# Altium PCB MiniRobot.PcbDoc
Units mm, origin at the board's own origin, x right, y up, seen from the top; angles counter-clockwise.
Board outline 90 x 85 mm, 2 copper layers (Top Layer, Bottom Layer); 52 components, 47 nets, 193 pads, 19 vias.
Unrouted connection lines stored in the file: 43.
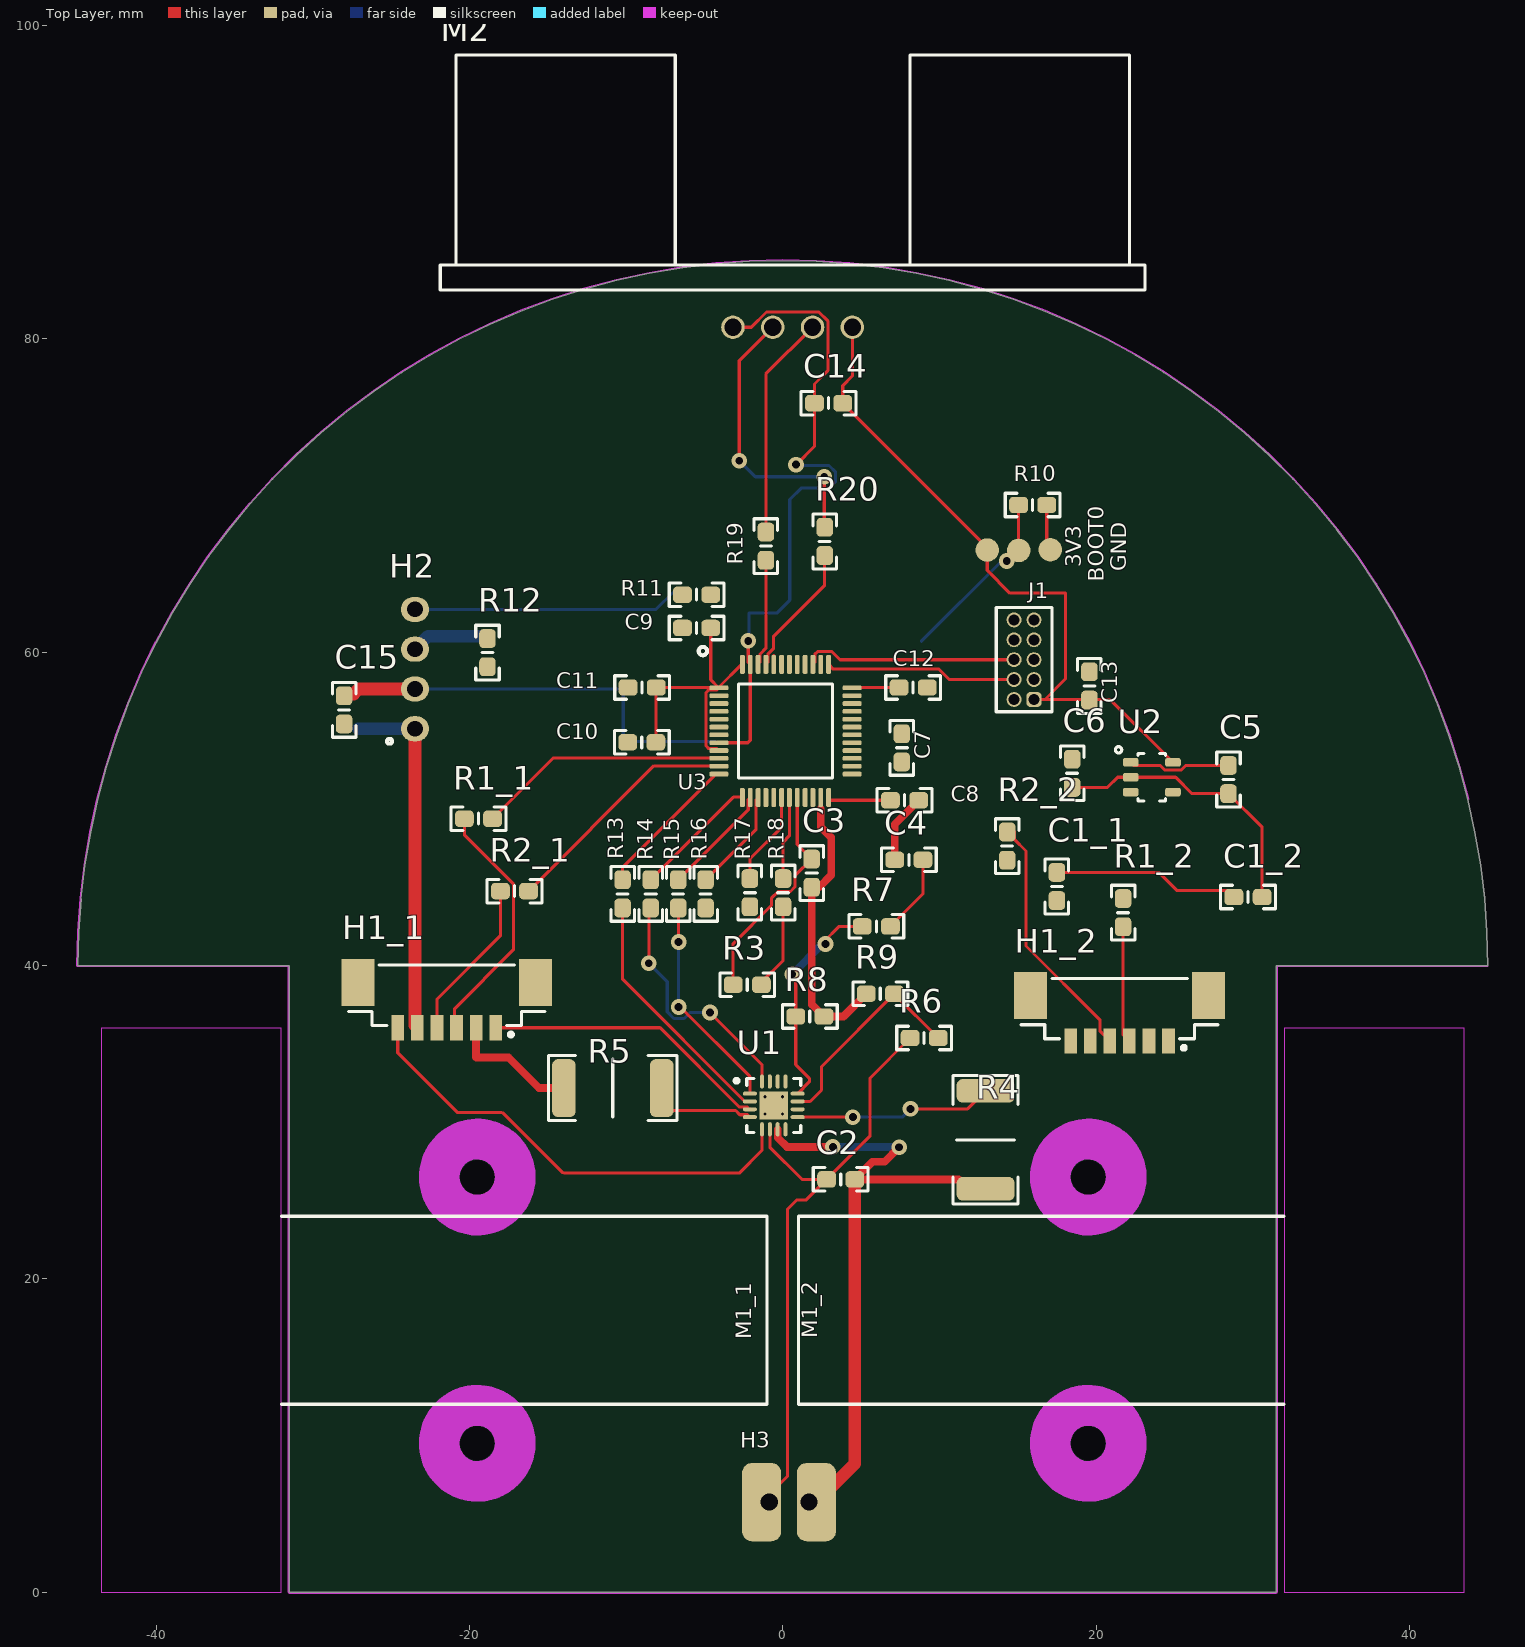
[diagram p0: Top Layer view]
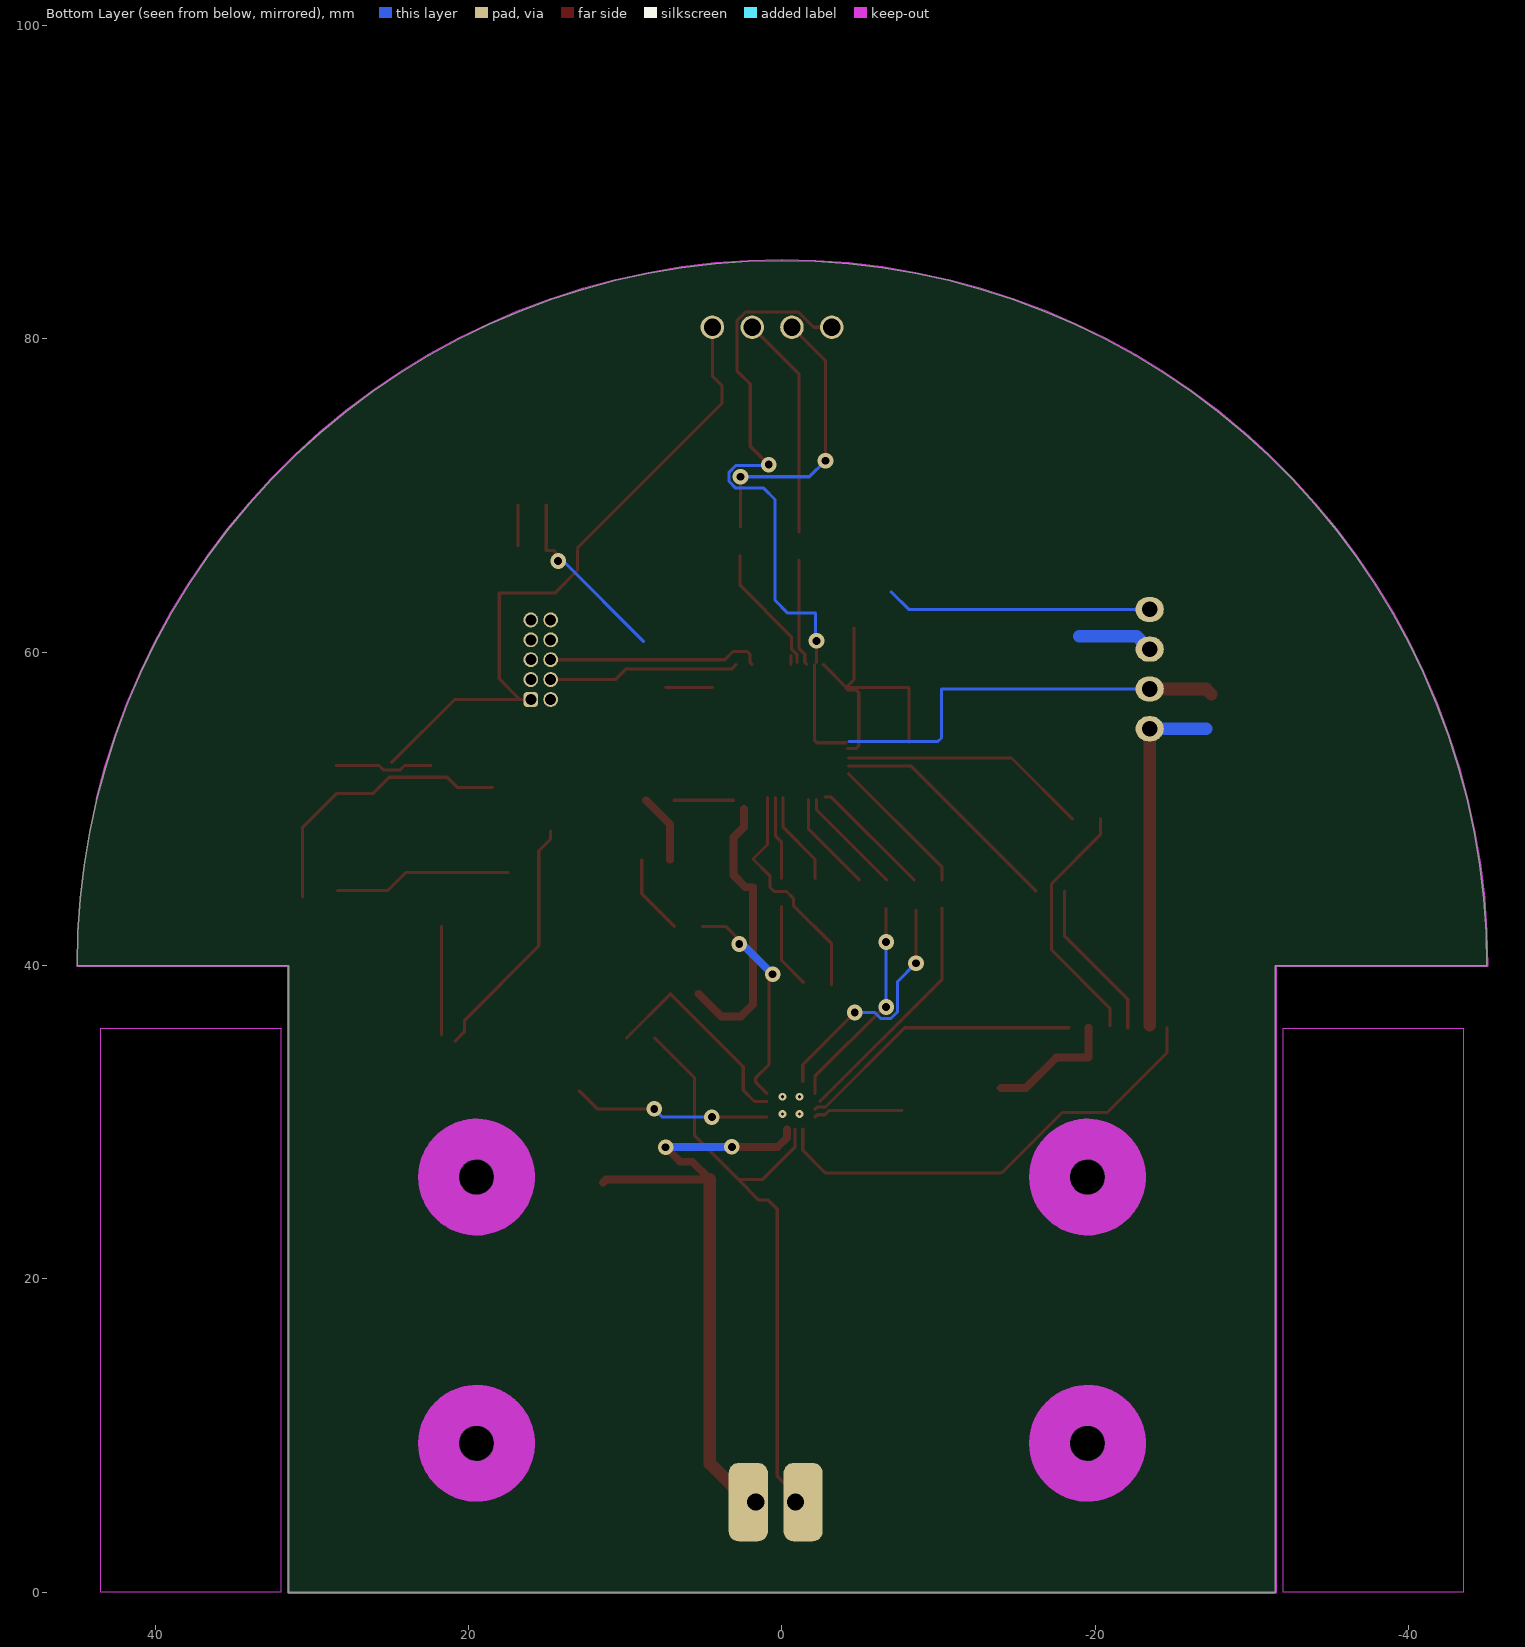
[diagram p1: Bottom Layer view, seen from below]

## Layer stack, top to bottom
Top Solder: solder mask 0.0102, Solder Resist, Dk 3.5
Top Layer: signal copper 0.0356
Dielectric 1: dielectric 0.32, FR-4, Dk 4.8
Bottom Layer: signal copper 0.0356
Bottom Solder: solder mask 0.0102, Solder Resist, Dk 3.5

## Board outline
45,40 44.949,42.141 44.796,44.278 44.542,46.404 44.187,48.516 43.732,50.609 43.177,52.678 42.525,54.718 41.777,56.725 40.933,58.694 39.998,60.62 38.971,62.5 37.856,64.329 36.656,66.103 35.372,67.817 34.009,69.469 32.568,71.054 31.054,72.568 29.469,74.009 27.817,75.372 26.103,76.656 24.329,77.856 22.5,78.971 20.62,79.998 18.694,80.933 16.725,81.777 14.718,82.525 12.678,83.177 10.609,83.732 8.516,84.187 6.404,84.542 4.278,84.796 2.141,84.949 0,85 -2.141,84.949 -4.278,84.796 -6.404,84.542 -8.516,84.187 -10.609,83.732 -12.678,83.177 -14.718,82.525 -16.725,81.777 -18.694,80.933 -20.62,79.998 -22.5,78.971 -24.329,77.856 -26.103,76.656 -27.817,75.372 -29.469,74.009 -31.054,72.568 -32.568,71.054 -34.009,69.469 -35.372,67.817 -36.656,66.103 -37.856,64.329 -38.971,62.5 -39.998,60.62 -40.933,58.694 -41.777,56.725 -42.525,54.718 -43.177,52.678 -43.732,50.609 -44.187,48.516 -44.542,46.404 -44.796,44.278 -44.949,42.141 -45,40 -31.5,40 -31.5,0 31.5,0 31.5,40

## Design rules (kind name [scope] priority, off if disabled: settings)
Clearance [All] p1: gap=0.125
ComponentClearance [All] p1 off: gap=0.254 collisioncheckmode=3 verticalgap=0.254 showdistances=FALSE
HoleSize [All] p1: absolutevalues=TRUE maxlimit=10 minlimit=0.19 maxpercent=80.000 minpercent=20.000
MinimumAnnularRing [All] p1: minimumring=0.076
MinimumSolderMaskSliver [All] p1: minsoldermaskwidth=0.154
PolygonConnect [All] p1: connectstyle=Relief reliefconductorwidth=0.254 reliefentries=4 polygonreliefangle="45 Angle" airgapwidth=0.254
RoutingVias [All] p1: holewidth=0.25 width=0.6 viastyle="Through Hole" minholewidth=0.2 minwidth=0.45 maxholewidth=1 maxwidth=2
SilkToSilkClearance [All] p1: silktosilkclearance=0.154
SilkToSolderMaskClearance [IsPad] p1: minsilkscreentomaskgap=0 clearancetoexposedcopper=TRUE
SolderMaskExpansion SolderMask_Via [IsVia] p1: expansion=-100
SolderMaskExpansion [All] p2: expansion=0.102
Width [All] p1: maxlimit=10 minlimit=0.075 preferedwidth=0.2 minimp=50.000000 maximp=50.000000 favimp=50.000000
24 further rules are at their usual default settings.

## Classes and differential pairs
component class U_MR_Mcu: 3V3 BOOT0 C7 C8 C9 C10 C11 C12 C13 GND J1 R10 R11 R13 R14 R15 R16 R17 R18 U3
component class LeftMotor: C1_1 H1_1 M1_1 R1_1 R2_1
component class RightMotor: C1_2 H1_2 M1_2 R1_2 R2_2
component class U_MR_Power: C5 C6 H3 U2
channel class MR_Motor: LeftMotor RightMotor
component class U_MR_Motor_Control: C2 C3 C4 R3 R4 R5 R6 R7 R8 R9 U1
component class U_MR_RangeSensor: C14 M2 R20
component class U_MR_UartConnector: C15 H2 R12

## Components (designator, comment, footprint, x,y, rotation, side; value= is the part's Value field where it differs from the comment)
3V3 "TestPoint" ROUND_TEST_POINT 13.05,66.525 r180 top
BOOT0 "TestPoint" ROUND_TEST_POINT 15.063,66.5 r270 top
C1_1 "CerCap" 0603_CAP_LD 17.5,45.05 r90 top (schematic designator C1)
C1_2 "CerCap" 0603_CAP_LD 29.7,44.375 r180 top (schematic designator C1)
C2 "CerCap" 0603_CAP_LD 3.7,26.35 r180 top
C3 "CerCap" 0603_CAP_LD 1.85,45.9 r90 top
C4 "CerCap" 0603_CAP_LD 8.05,46.75 r0 top
C5 "CerCap" 0603_CAP_LD 28.45,51.875 r90 top
C6 "CerCap" 0603_CAP_LD 18.475,52.275 r90 top
C7 "CerCap" 0603_CAP_LD 7.6,53.9 r270 top
C8 "CerCap" 0603_CAP_LD 7.775,50.55 r180 top
C9 "CerCap" 0603_CAP_LD -5.5,61.55 r0 top
C10 "CerCap" 0603_CAP_LD -9,54.25 r0 top
C11 "CerCap" 0603_CAP_LD -8.975,57.75 r0 top
C12 "CerCap" 0603_CAP_LD 8.325,57.75 r180 top
C13 "CerCap" 0603_CAP_LD 19.575,57.85 r270 top
C14 "CerCap" 0603_CAP_LD 2.925,75.9 r0 top
C15 "CerCap" 0603_CAP_LD -28,56.325 r270 top
GND "TestPoint" ROUND_TEST_POINT 17.075,66.55 r90 top
H1_1 "Header" HEADER_1X6_PICOBLADE_653106124022 -21.45,38.1 r180 top (schematic designator H1)
H1_2 "Header" HEADER_1X6_PICOBLADE_653106124022 21.5,37.25 r180 top (schematic designator H1)
H2 "Header" "HE14 1x4 Straight" -23.475,58.925 r90 top
H3 "CustomBatteryConnector" CUSTOMBATTERYCONNECTOR 0.4,5.75 r0 top
J1 "Debug" 62201021121 15.4,59.525 r90 top
M1_1 "MotorGroup" MOTORGROUP -1,18 r0 top locked (schematic designator M1)
M1_2 "MotorGroup" MOTORGROUP 1,18 r180 top locked (schematic designator M1)
M2 "Ultrasonic Range Sensor" HC-SR04 0.633,80.748 r0 top
R1_1 "Resistor" 0603_RES_LD -19.425,49.375 r180 top (schematic designator R1)
R1_2 "Resistor" 0603_RES_LD 21.725,43.375 r270 top (schematic designator R1)
R2_1 "Resistor" 0603_RES_LD -17.125,44.75 r180 top (schematic designator R2)
R2_2 "Resistor" 0603_RES_LD 14.325,47.625 r90 top (schematic designator R2)
R3 "Resistor" 0603_RES_LD -2.267,38.774 r0 top
R4 "Resistor" 2512_RES_LD 12.95,28.875 r90 top
R5 "Resistor" 2512_RES_LD -10.85,32.175 r0 top
R6 "Resistor" 0603_RES_LD 9.025,35.375 r180 top
R7 "Resistor" 0603_RES_LD 5.975,42.5 r180 top
R8 "Resistor" 0603_RES_LD 1.725,36.75 r180 top
R9 "Resistor" 0603_RES_LD 6.225,38.2 r0 top
R10 "Resistor" 0603_RES_LD 15.95,69.4 r180 top
R11 "Resistor" 0603_RES_LD -5.5,63.675 r0 top
R12 "Resistor" 0603_RES_LD -18.85,59.975 r90 top
R13 "Resistor" 0603_RES_LD -10.225,44.575 r90 top
R14 "Resistor" 0603_RES_LD -8.425,44.575 r90 top
R15 "Resistor" 0603_RES_LD -6.675,44.575 r90 top
R16 "Resistor" 0603_RES_LD -4.925,44.575 r90 top
R17 "Resistor" 0603_RES_LD -2.1,44.65 r90 top
R18 "Resistor" 0603_RES_LD 0.025,44.65 r90 top
R19 "Resistor" 0603_RES_LD -1.075,66.775 r270 top
R20 "Resistor" 0603_RES_LD 2.675,67.075 r90 top
U1 "Dual Brush Motor Driver" QFN-STSPIN240 -0.575,31.075 r0 top
U2 "Low noise, Low Iq LDO" LP5907 23.558,52.023 r0 top
U3 "Microcontroller" STM32_LQFP48 0.175,54.975 r0 top

## Footprints (in the part's own frame and the unit in brackets; to place one, negate y for a bottom-side part, rotate by r counter-clockwise, add the part's x,y. Pads: shape width x height; smd on the part's side, far side on the other; paste and mask are expansions set on the pad)
0603_CAP_LD [mm] "0603 Capacitor Low Density"
  rrect50% 1.2x1.05 smd: 1(-0.9,0) 2(0.9,0)
  silkscreen extent -1.75,-0.75 1.75,0.75
0603_RES_LD [mm] "0603 Resistor Low Density"
  rrect50% 1.2x1.05 smd: 1(-0.9,0) 2(0.9,0)
  silkscreen extent -1.75,-0.75 1.75,0.75
2512_RES_LD [mm] "2512 Low Density Resistor"
  rrect50% 1.5x3.7 smd: 1(-3.125,0) 2(3.125,0)
  silkscreen extent -4.1,-2.07 4.1,2.07
62201021121 [mm] "Pin Header, pitch 1.27 mm, THT, Vertical, dual row, 10p"
  rrect50% 0.95x0.95 hole 0.7: 1(-2.54,-0.635)
  round 0.95 hole 0.7: 2(-2.54,0.635) 3(-1.27,-0.635) 4(-1.27,0.635) 5(0,-0.635) 6(0,0.635) 7(1.27,-0.635) 8(1.27,0.635) 9(2.54,-0.635) 10(2.54,0.635)
  silkscreen extent -3.32,-1.78 3.32,1.78, body extent -3.17,-1.7 3.18,1.7, height 5.33
CUSTOMBATTERYCONNECTOR [mm] "CustomBatteryConnector"
  rrect50% 2.5x5 smd paste-100: +(-1.75,0) -(1.75,0)
  rrect50% 2.5x5 smd far side paste-100: +(-1.75,0) -(1.75,0)
  round 1.5 hole 1.1 unplated paste-100: +(-1.27,0) -(1.27,0)
HC-SR04 [mm] "HC-SR04"
  round 1.5 hole 1.1 unplated: 1(-3.81,0) 2(-1.27,0) 3(1.27,0) 4(3.81,0)
  silkscreen extent -22.5,2.38 22.5,17.38, body extent -22.72,-0.3 22.72,17.49, height 20
"HE14 1x4 Straight" [mm] "Connector HE14 Straight 1x4"
  oval 1.6x1.8 hole 1 mask+0.102: 1(-3.81,0) 2(-1.27,0) 3(1.27,0) 4(3.81,0)
  silkscreen extent -4.77,1.47 -4.45,1.78, body extent -5.08,-1.27 5.08,1.27, height 9.5
HEADER_1X6_PICOBLADE_653106124022 [mm] "1.25mm SMT Male Vertical Shrouded Header, 6p"
  rect 0.81x1.6 smd: 1(-3.125,2.07) 2(-1.875,2.07) 3(-0.625,2.07) 4(0.625,2.07) 5(1.875,2.07) 6(3.125,2.07)
  rect 2.1x3 smd: ""(-5.675,-0.83) ""(5.675,-0.83)
  silkscreen extent -6.27,-1.92 6.27,2.62
LP5907 [mm] "LP5907 SOT23"
  rrect50% 1x0.55 smd mask+0.102: 1(-1.35,0.95) 2(-1.35,0) 3(-1.35,-0.95) 4(1.35,-0.95) 5(1.35,0.95)
  silkscreen extent -2.33,-1.52 0.88,1.95
MOTORGROUP [mm]
  round 0 hole 2.2 unplated paste+0 mask+0: 21(-18.5,8.5) 22(-18.5,-8.5)
  Keep-Out Layer circle w2.6: c-18.5,8.5 r2.425
  Keep-Out Layer circle w2.6: c-18.5,-8.5 r2.425
  Keep-Out Layer region: -31,-18 -31,18 -42.5,18 -42.5,-18
  silkscreen extent -31,-6 0,6
QFN-STSPIN240 [mm] "QFN, 16-Leads, Body 3,00x3,00mm, Pitch 0,50mm, Thermal Pad 1,80x1,80mm, IPC Low Density"
  oval 0.9x0.25 smd: 1(-1.525,0.75) 2(-1.525,0.25) 3(-1.525,-0.25) 4(-1.525,-0.75) 9(1.525,-0.75) 10(1.525,-0.25) 11(1.525,0.25) 12(1.525,0.75)
  oval 0.25x0.9 smd: 5(-0.75,-1.525) 6(-0.25,-1.525) 7(0.25,-1.525) 8(0.75,-1.525) 13(0.75,1.525) 14(0.25,1.525) 15(-0.25,1.525) 16(-0.75,1.525)
  rect 1.8x1.8 smd: 17(0,0)
  silkscreen extent -2.5,-1.73 1.73,1.73
ROUND_TEST_POINT [mm] "Small round test point"
  round 1.5 smd paste-100: 1(0,0)
STM32_LQFP48 [mm]
  rrect50% 1.2x0.3 smd: 1(-4.25,2.75) 2(-4.25,2.25) 3(-4.25,1.75) 4(-4.25,1.25) 5(-4.25,0.75) 6(-4.25,0.25) 7(-4.25,-0.25) 8(-4.25,-0.75) 9(-4.25,-1.25) 10(-4.25,-1.75) 11(-4.25,-2.25) 12(-4.25,-2.75) 25(4.25,-2.75) 26(4.25,-2.25) 27(4.25,-1.75) 28(4.25,-1.25) 29(4.25,-0.75) 30(4.25,-0.25) 31(4.25,0.25) 32(4.25,0.75) 33(4.25,1.25) 34(4.25,1.75) 35(4.25,2.25) 36(4.25,2.75)
  rrect50% 0.3x1.2 smd: 13(-2.75,-4.25) 14(-2.25,-4.25) 15(-1.75,-4.25) 16(-1.25,-4.25) 17(-0.75,-4.25) 18(-0.25,-4.25) 19(0.25,-4.25) 20(0.75,-4.25) 21(1.25,-4.25) 22(1.75,-4.25) 23(2.25,-4.25) 24(2.75,-4.25) 37(2.75,4.25) 38(2.25,4.25) 39(1.75,4.25) 40(1.25,4.25) 41(0.75,4.25) 42(0.25,4.25) 43(-0.25,4.25) 44(-0.75,4.25) 45(-1.25,4.25) 46(-1.75,4.25) 47(-2.25,4.25) 48(-2.75,4.25)
  silkscreen extent -5.54,-3 3,5.37

## Part data
C1_1 C1_2 C2 C3 C4 C5 C6 C7 C8 C9 C10 C11 C12 C13 C14 C15: "Ceramic Capacitor"
H1_1 H1_2: library part Header_6x1, "Header 6x1 Pins"
H2: library part Header_4x1, "Header 4x1 PIns"
H3: library part BatteryConnector, "Custom Battery Connector"
J1: library part Cortex_10x2, "Cortex 10 pins Debug Connector"
M1_1 M1_2: library part Motor
M2: library part HC-SR04
U1: library part STSPIN240, "ST Dual Motor Driver"
U2: library part LP5907, "LP5907 Low Noise Low Iq LDO"
U3: library part STM32F303CBT6, "STM32F303 Microcontroller"

## Via types
v1: diameter 1, hole 0.5, Top Layer to Bottom Layer, 15 vias
v2: diameter 0.5, hole 0.2, Top Layer to Bottom Layer, 4 vias

## Nets (pads, with @x,y where several pads share a name; then routed paths per layer and width w, separated by ;. In a path a pad name is that pad's centre, name@x,y a point inside that pad or via, vN(x,y) a via of type N, cw(c..) or ccw(c..) an arc to the next point about the centre after c; other vN are vias at no path point)
3V3: 3V3.1 C6.2 C7.2 C8.2 C9.2 C10.2 C11.2 C12.2 C13.2 C14.2 J1.1 M2.4 U2.5 U3.1 U3.9 U3.24 U3.36 U3.48 | length 68.4
  Top Layer w0.2: C10.2 -8.1,57.725 C11.2 U3.1@-4.1,57.75 ; C9.2 -4.6,58.25 U3.1@-4.1,57.75 ; U3.9@-4.2,53.85 -4.724,53.85 -4.9,54.026 -4.9,57.424 -4.724,57.6 -4.2,57.6 U3.1 U3.1@-4.1,57.75 ; U3.48@-2.625,59.225 U3.1@-4.1,57.75 ; 3.1,50.55 C8.2 ; M2.4 4.443,77.632 3.825,77.014 C14.2 3V3.1@13.05,66.675 ; U3.36@4.45,57.75 C12.2 ; 3V3.1 13.05,65.225 14.5,63.775 18.05,63.775 18.05,58.3 16.735,56.985 ; J1.1@16.045,56.975 20.906,56.975 U2.5
BOOT0: BOOT0.1 R10.2 U3.44 | length 12.3
  Top Layer w0.2: U3.44 U3.44@-0.575,59.79 ; v1(14.292,65.823) 14.292,66.192 14.6,66.5 BOOT0.1 ; BOOT0.1@15.05,66.513 R10.2
  Bottom Layer w0.2: 8.85,60.7 13.973,65.823 v1(14.292,65.823)
GND: C1_1.1 C1_2.1 C2.1 C3.1 C4.1 C5.1 C6.1 C7.1 C8.1 C9.1 C10.1 C11.1 C12.1 C13.1 C14.1 C15.1 GND.1 H1_1.2 H1_2.2 H2.2 H3.- J1.3 J1.5 J1.9 M2.1 R4.1 R5.1 R8.1 R9.1 R10.1 U1.7 U2.2 U3.8 U3.23 U3.35 U3.47 | length 161.6
  Top Layer w0.2: U3.8 -2.225,54.225 -2.075,54.375 U3.47 ; M2.1 -2.016,80.748 -1.041,81.723 2.307,81.723 2.878,81.152 2.878,77.978 2.025,77.125 C14.1 2.025,73.15 v1(0.85,71.975) ; U3.47@-2.2,59.35 v1(-2.2,60.725) ; GND.1@16.85,66.775 R10.1 ; C6.1 20.725,51.375 21.373,52.023 U2.2 25.077,52.023 26.125,50.975 C5.1 30.6,48.825 C1_2.1
  Top Layer w0.5: H1_1.2 -19.575,34.15 -19.55,34.125 -17.5,34.125 -15.55,32.175 R5.1 ; U1.7 -0.325,29.018 0.268,28.425 v1(3.2,28.425) ; 2.425,49.989 2.425,48.85 3.1,48.175 3.1,45.775 2.325,45 C3.1 1.85,37.525 R8.1 3.875,36.75 R9.1 ; C4.1 7.15,49.025 C8.1 ; v1(7.425,28.4) 6.5,27.475 5.725,27.475 C2.1 11.225,26.35 R4.1@11.425,26.15
  Top Layer w0.8: -27.4,57.325 -27.07,57.655 H2.2 ; H3.-@2.15,5.75 4.6,8.2 C2.1
  Bottom Layer w0.2: H2.2 -10.18,57.655 -10.18,54.53 -9.95,54.3 -4.275,54.3 ; v1(-2.2,60.725) -2.15,60.775 -2.15,62.5 -0.375,62.5 0.45,63.325 0.45,69.75 1.175,70.475 2.95,70.475 3.375,70.9 3.375,71.5 2.95,71.925 0.9,71.925 v1(0.85,71.975)
  Bottom Layer w0.5: v1(3.2,28.425) 7.45,28.425 v1(7.425,28.4)
NetC3_2: C3.2 R3.1 U1.13 U3.20 | length 14.9
  Top Layer w0.2: R3.1 -3.167,41.394 -0.725,43.836 -0.725,44.289 -0.289,44.725 0.489,44.725 0.775,45.011 0.775,45.725 C3.2 0.925,47.725 U3.20
NetC4_2: C4.2 R7.1 | length 5.1
  Top Layer w0.2: R7.1 8.95,44.575 C4.2
NetH1_1_1: H1_1.1 U1.3 | length 18.4
  Top Layer w0.2: H1_1.1 -7.83,36.03 -2.775,30.975 -2.25,30.975 U1.3
NetH1_1_3: H1_1.3 R1_1.2 | length 16.1
  Top Layer w0.2: H1_1.3@-20.95,36.155 -20.95,37.25 -17.2,41 -17.2,45.214 -20.325,48.339 R1_1.2
NetH1_1_4: H1_1.4 R2_1.2 | length 10.4
  Top Layer w0.2: H1_1.4 -22.075,37.85 -18.025,41.9 R2_1.2
NetH1_1_6: H1_1.6 U1.5 | length 29.7
  Top Layer w0.2: H1_1.6 -24.575,34.425 -20.775,30.625 -17.95,30.625 ; -17.875,30.6 -14.08,26.805 ; -13.95,26.75 -2.775,26.75 -1.325,28.2 U1.5
NetH1_2_1: H1_2.1 U1.10
NetH1_2_3: H1_2.3 R1_2.2 | length 6.9
  Top Layer w0.2: H1_2.3@21.725,35.58 R1_2.2
NetH1_2_4: H1_2.4 R2_2.2 | length 15.9
  Top Layer w0.2: R2_2.2@14.775,48.575 14.775,48.064 15.525,47.314 15.525,41.248 20.255,36.518 20.255,35.8 H1_2.4
NetH1_2_6: H1_2.6 U1.8
NetH2_3: H2.3 R12.2 | length 4.8
  Bottom Layer w0.8: H2.3 -22.645,61.025 -18.975,61.025
NetH2_4: H2.4 R11.1 | length 17
  Bottom Layer w0.2: H2.4 -8.09,62.735 -6.975,63.85
NetM2_2: M2.2 R20.2 | length 18.5
  Top Layer w0.2: v1(-2.775,72.225) -2.775,78.61 M2.2 ; R20.2@2.65,68 v1(2.65,71.2)
  Bottom Layer w0.2: v1(-2.775,72.225) -1.75,71.2 v1(2.65,71.2)
NetM2_3: M2.3 R19.1 | length 14.3
  Top Layer w0.2: R19.1 -1.075,77.77 M2.3
NetR1_1_1: R1_1.1 U3.10 | length 15.9
  Top Layer w0.2: R1_1.1 -14.65,53.25 U3.10@-4.25,53.25
NetR1_2_1: R1_2.1 U3.16
NetR2_1_1: R2_1.1 U3.11 | length 15.3
  Top Layer w0.2: R2_1.1 -8.225,52.75 U3.11@-4.25,52.75
NetR2_2_1: R2_2.1 U3.17
NetR3_2: R3.2 R18.1 | length 5.4
  Top Layer w0.2: R3.2@-1.367,38.933 0.025,40.325 R18.1
NetR4_2: R4.2 U1.9 | length 12.7
  Top Layer w0.2: U1.9 v1(4.475,30.325) ; v1(8.15,30.85) 11.8,30.85 R4.2
  Bottom Layer w0.2: v1(4.475,30.325) 7.625,30.325 v1(8.15,30.85)
NetR5_2: R5.2 U1.4 | length 5.7
  Top Layer w0.2: R5.2@-7.65,30.75 -3.01,30.75 -2.735,30.475 -2.25,30.475 U1.4
NetR6_1: R6.1 R9.2 U1.11 | length 13.9
  Top Layer w0.2: U1.11 1.75,31.325 2.475,32.05 2.475,33.55 R9.2 ; R9.2@7.125,38.175 R6.1
NetR7_2: R7.2 R8.2 U1.12 | length 14.4
  Top Layer w0.2: v1(0.6,39.45) 0.825,39.225 R8.2 0.825,33.675 1.7,32.8 1.7,32.575 U1.12 ; v1@2.6,41.5 3.6,42.5 R7.2
  Top Layer w0.5: v1@2.6,41.5 2.723,41.377 v1(2.725,41.377)
  Bottom Layer w0.5: v1(0.6,39.45) 2.527,41.377 v1(2.725,41.377)
NetR11_2: R11.2 U3.42
NetR12_1: R12.1 U3.43
NetR13_1: R13.1 U1.2 | length 15.6
  Top Layer w0.2: R13.1 -10.225,39.13 U1.2@-2.42,31.325
NetR13_2: R13.2 U3.12 | length 9.2
  Top Layer w0.2: R13.2 -10.225,46.275 U3.12@-4.25,52.25
NetR14_1: R14.1 U1.16 | length 15.8
  Top Layer w0.2: v1(-8.55,40.15) R14.1@-8.55,43.55 ; v1(-4.65,37) -1.325,33.675 U1.16
  Bottom Layer w0.2: v1(-8.55,40.15) -7.375,38.975 -7.375,37.05 -6.95,36.625 -6.3,36.625 -5.925,37 v1(-4.65,37)
NetR14_2: R14.2 U3.13 | length 7.9
  Top Layer w0.2: R14.2 -3.15,50.75 -2.75,50.75
NetR15_1: R15.1 U1.1 | length 13.8
  Top Layer w0.2: v1(-6.65,37.35) -6.525,37.35 -2.1,32.925 U1.1 ; v1(-6.65,41.5) R15.1@-6.65,43.65
  Bottom Layer w0.2: v1(-6.65,37.35) v1(-6.65,41.5)
NetR15_2: R15.2 U3.14 | length 7
  Top Layer w0.2: R15.2 -2.2,49.95 U3.14@-2.2,50.6
NetR16_1: R16.1 U1.15
NetR16_2: R16.2 U3.15 | length 6.5
  Top Layer w0.2: R16.2 -1.7,48.7 U3.15@-1.7,50.6
NetR17_1: R17.1 U1.14
NetR17_2: R17.2 U3.18 | length 6
  Top Layer w0.2: R17.2 -2.1,46.8 -0.075,48.825 U3.18
NetR18_2: R18.2 U3.19 | length 5.3
  Top Layer w0.2: R18.2 0.025,47.875 0.425,48.275 U3.19
NetR19_2: R19.2 U3.46 | length 6.9
  Top Layer w0.2: U3.46 -1.45,59.35 -1.45,59.874 -1.075,60.249 R19.2
NetR20_1: R20.1 U3.45 | length 8.3
  Top Layer w0.2: U3.45@-0.95,59.35 -0.95,59.874 -0.6,60.224 -0.6,61 2.675,64.275 R20.1
nRST: J1.10 U3.7
SWCLK: J1.4 U3.37 | length 12.2
  Top Layer w0.2: U3.37 3.225,58.925 9.975,58.925 10.645,58.255 J1.4
SWDIO: J1.2 U3.34 | length 0.2
  Top Layer w0.2: J1.2@14.63,56.85 J1.2
SWO: J1.6 U3.39 | length 13.7
  Top Layer w0.2: U3.39 2.05,59.35 2.05,59.874 2.226,60.05 3.124,60.05 3.649,59.525 J1.6
VBAT: C1_1.2 C1_2.2 | length 11.4
  Top Layer w0.2: C1_1.2 24,45.95 25.15,44.8 C1_2.2@28.375,44.8
VBATT: C2.2 C5.2 C15.2 H1_1.5 H1_2.5 H2.1 H3.+ R6.2 U1.6 U2.1 U2.3 | length 68.4
  Top Layer w0.2: H3.+@-1.35,5.75 0.3,7.4 0.3,24.45 0.875,25.025 1.475,25.025 C2.2 ; U1.6 -0.825,28.4 1.225,26.35 C2.2 ; R6.2 5.575,32.825 5.575,29.125 C2.2 ; U2.1@22.406,52.775 24.094,52.775 24.395,52.473 25.421,52.473 25.723,52.775 C5.2
  Top Layer w0.8: H1_1.5@-23.475,36.18 H2.1
  Bottom Layer w0.8: -27.09,55.115 H2.1
pads on no net: H1_1. H1_2. J1.7 J1.8 M1_1.21 M1_1.22 M1_2.21 M1_2.22 U1.17 U2.4 U3.2 U3.3 U3.4 U3.5 U3.6 U3.21 U3.22 U3.25 U3.26 U3.27 U3.28 U3.29 U3.30 U3.31 U3.32 U3.33 U3.38 U3.40 U3.41
copper on no net:
  other v2: -1.125,30.525 -0.025,30.525 -1.125,31.625 -0.025,31.625

## Keep-outs
Keep-Out Layer:
  lines w0.1: 43.78,50.622 43.226,52.691 ; 45,39.95 31.55,39.95 31.55,0 ; -45.05,40.002 ccw(c-45,40) -45,39.95 ; -45.05,40.001 ccw(c-45,40) -45,39.95 ; -45.05,40.001 -45.05,40.002 ; -45.05,40.002 -44.999,42.142 ; -45,39.95 -31.55,39.95 -31.55,0 ; -44.999,42.142 cw(c-44.949,42.141) -44.999,42.145 ; -44.999,42.142 cw(c-44.949,42.141) -44.999,42.145 ; -44.999,42.142 -44.999,42.142 ; -44.999,42.145 -44.846,44.281 ; -44.846,44.281 cw(c-44.796,44.278) -44.846,44.283 ; -44.846,44.281 cw(c-44.796,44.278) -44.846,44.283 ; -44.846,44.283 -44.592,46.41 ; -44.592,46.41 cw(c-44.542,46.404) -44.591,46.412 ; -44.592,46.41 cw(c-44.542,46.404) -44.591,46.413 ; -44.591,46.412 -44.591,46.413 ; -44.591,46.413 -44.236,48.524 ; -44.236,48.524 cw(c-44.187,48.516) -44.236,48.527 ; -44.236,48.525 cw(c-44.187,48.516) -44.236,48.527 ; -44.236,48.524 -44.236,48.525 ; -44.236,48.527 ccw(c-44.187,48.516) -44.236,48.527 ; -44.236,48.527 -44.236,48.527 ; -44.236,48.527 -44.236,48.527 ; -44.236,48.527 -43.78,50.62 ; -43.78,50.62 cw(c-43.732,50.609) -43.78,50.622 ; -43.78,50.62 ccw(c-43.732,50.609) -43.78,50.62 ; -43.78,50.62 cw(c-43.732,50.609) -43.78,50.622 ; -43.78,50.62 -43.78,50.62 ; -43.78,50.62 -43.78,50.62 ; -43.78,50.622 ccw(c-43.732,50.609) -43.78,50.622 ; -43.78,50.622 -43.78,50.622 ; -43.78,50.622 -43.78,50.622 ; -43.78,50.622 -43.226,52.691 ; -43.226,52.691 cw(c-43.177,52.678) -43.225,52.693 ; -43.226,52.691 ccw(c-43.177,52.678) -43.226,52.691 ; -43.226,52.691 cw(c-43.177,52.678) -43.225,52.693 ; -43.226,52.691 -43.226,52.691 ; -43.226,52.691 -43.226,52.691 ; -43.225,52.693 -42.573,54.733 ; -42.573,54.733 cw(c-42.525,54.718) -42.572,54.736 ; -42.573,54.733 cw(c-42.525,54.718) -42.572,54.735 ; -42.572,54.736 ccw(c-42.525,54.718) -42.572,54.735 ; -42.572,54.735 -42.572,54.736 ; -42.572,54.736 -42.572,54.736 ; -42.572,54.736 -41.824,56.742 ; -41.823,56.742 cw(c-41.777,56.725) -41.823,56.744 ; -41.823,56.742 ccw(c-41.777,56.725) -41.823,56.742 ; -41.823,56.742 cw(c-41.777,56.725) -41.823,56.744 ; -41.824,56.742 -41.823,56.742 ; -41.823,56.742 -41.823,56.742 ; -41.823,56.744 -40.979,58.713 ; -40.979,58.713 cw(c-40.933,58.694) -40.978,58.716 ; -40.979,58.713 cw(c-40.933,58.694) -40.979,58.715 ; -40.979,58.715 cw(c-40.933,58.694) -40.978,58.716 ; -40.979,58.715 -40.978,58.716 ; -40.978,58.716 -40.978,58.716 ; -40.978,58.716 -40.043,60.642 ; -40.043,60.642 cw(c-39.998,60.62) -40.043,60.642 ; -40.043,60.642 cw(c-39.998,60.62) -40.042,60.644 ; -40.043,60.642 -40.043,60.642 ; -40.043,60.642 -40.043,60.642 ; -40.043,60.642 cw(c-39.998,60.62) -40.042,60.644 ; -40.042,60.644 -39.015,62.524 ; -39.015,62.524 cw(c-38.971,62.5) -39.014,62.526 ; -39.015,62.524 cw(c-38.971,62.5) -39.014,62.526 ; -39.014,62.526 -37.899,64.355 ; -37.899,64.355 cw(c-37.856,64.329) -37.898,64.357 ; -37.899,64.355 cw(c-37.856,64.329) -37.898,64.357 ; -37.898,64.357 -37.898,64.357 ; -37.898,64.357 -36.698,66.13 ; -36.698,66.13 cw(c-36.656,66.103) -36.696,66.133 ; -36.697,66.131 cw(c-36.656,66.103) -36.696,66.133 ; -36.698,66.13 -36.697,66.131 ; -36.696,66.133 -35.412,67.847 ; -35.412,67.847 cw(c-35.372,67.817) -35.411,67.849 ; -35.412,67.847 cw(c-35.372,67.817) -35.411,67.849 ; -35.411,67.849 -34.047,69.501 ; -34.047,69.501 cw(c-34.009,69.469) -34.046,69.502 ; -34.047,69.501 cw(c-34.009,69.469) -34.046,69.502 ; -34.046,69.503 ccw(c-34.009,69.469) -34.046,69.502 ; -34.046,69.502 -34.046,69.502 ; -34.046,69.502 -34.046,69.503 ; -34.046,69.503 -32.605,71.087 ; -32.605,71.087 cw(c-32.568,71.054) -32.603,71.089 ; -32.605,71.087 ccw(c-32.568,71.054) -32.605,71.087 ; -32.605,71.087 cw(c-32.568,71.054) -32.603,71.089 ; -32.605,71.087 -32.605,71.087 ; -32.605,71.087 -32.605,71.087 ; -32.603,71.089 -31.089,72.603 ; -31.55,0 ccw(c-31.5,0) -31.5,-0.05 ; -31.55,0 ccw(c-31.5,0) -31.5,-0.05 ; -31.5,-0.05 31.5,-0.05 ; -31.089,72.603 cw(c-31.054,72.568) -31.087,72.605 ; -31.089,72.603 cw(c-31.054,72.568) -31.087,72.605 ; -31.087,72.605 ccw(c-31.054,72.568) -31.087,72.605 ; -31.087,72.605 -31.087,72.605 ; -31.087,72.605 -31.087,72.605 ; -31.087,72.605 -29.503,74.046 ; -29.503,74.046 cw(c-29.469,74.009) -29.502,74.046 ; -29.503,74.046 -29.502,74.046 ; -29.502,74.046 cw(c-29.469,74.009) -29.501,74.047 ; -29.502,74.046 cw(c-29.469,74.009) -29.501,74.047 ; -29.502,74.046 -29.502,74.046 ; -29.501,74.047 -27.849,75.411 ; -27.849,75.411 cw(c-27.817,75.372) -27.847,75.412 ; -27.849,75.411 cw(c-27.817,75.372) -27.847,75.412 ; -27.847,75.412 -26.133,76.696 ; -26.133,76.696 cw(c-26.103,76.656) -26.131,76.697 -26.13,76.698 ; -26.133,76.696 cw(c-26.103,76.656) -26.13,76.698 ; -26.13,76.698 -24.357,77.898 ; -24.357,77.898 cw(c-24.329,77.856) -24.355,77.899 ; -24.357,77.898 cw(c-24.329,77.856) -24.355,77.899 ; -24.357,77.898 -24.357,77.898 ; -24.355,77.899 -22.526,79.014 ; -22.526,79.014 cw(c-22.5,78.971) -22.524,79.015 ; -22.526,79.014 cw(c-22.5,78.971) -22.524,79.015 ; -22.524,79.015 -20.644,80.041 ; -20.644,80.041 cw(c-20.62,79.998) -20.642,80.043 ; -20.644,80.041 cw(c-20.62,79.998) -20.642,80.042 ; -20.642,80.042 cw(c-20.62,79.998) -20.642,80.043 ; -20.642,80.042 -20.642,80.043 ; -20.642,80.043 -20.642,80.043 ; -20.642,80.043 -18.716,80.978 ; -18.715,80.979 cw(c-18.694,80.933) -18.713,80.979 ; -18.715,80.979 ccw(c-18.694,80.933) -18.716,80.978 ; -18.716,80.978 cw(c-18.694,80.933) -18.713,80.979 ; -18.716,80.978 -18.716,80.978 ; -18.716,80.978 -18.715,80.979 ; -18.713,80.979 -16.745,81.823 ; -16.745,81.823 cw(c-16.725,81.777) -16.742,81.823 ; -16.745,81.823 cw(c-16.725,81.777) -16.742,81.823 ; -16.742,81.823 cw(c-16.725,81.777) -16.742,81.823 ; -16.742,81.823 -16.742,81.823 ; -16.742,81.823 -16.742,81.823 ; -16.742,81.823 -14.736,82.572 ; -14.736,82.572 cw(c-14.718,82.525) -14.735,82.572 ; -14.736,82.572 -14.736,82.572 ; -14.735,82.572 cw(c-14.718,82.525) -14.733,82.573 ; -14.736,82.572 cw(c-14.718,82.525) -14.733,82.573 ; -14.736,82.572 -14.735,82.572 ; -14.733,82.573 -12.693,83.225 ; -12.693,83.225 cw(c-12.678,83.177) -12.691,83.226 ; -12.693,83.225 cw(c-12.678,83.177) -12.691,83.225 ; -12.691,83.225 cw(c-12.678,83.177) -12.691,83.226 ; -12.691,83.225 -12.691,83.226 ; -12.691,83.226 -12.691,83.226 ; -12.691,83.226 -10.622,83.78 ; -10.622,83.78 cw(c-10.609,83.732) -10.622,83.78 ; -10.622,83.78 -10.622,83.78 ; -10.622,83.78 cw(c-10.609,83.732) -10.62,83.78 ; -10.622,83.78 cw(c-10.609,83.732) -10.62,83.78 ; -10.622,83.78 -10.622,83.78 ; -10.62,83.78 -8.527,84.236 ; -8.527,84.236 cw(c-8.516,84.187) -8.525,84.236 -8.524,84.236 ; -8.527,84.236 cw(c-8.516,84.187) -8.524,84.236 ; -8.524,84.236 -6.413,84.591 ; -6.413,84.591 cw(c-6.404,84.542) -6.41,84.592 ; -6.412,84.591 cw(c-6.404,84.542) -6.41,84.592 ; -6.413,84.591 -6.412,84.591 ; -6.41,84.592 -4.283,84.846 ; -4.283,84.846 cw(c-4.278,84.796) -4.281,84.846 ; -4.283,84.846 cw(c-4.278,84.796) -4.281,84.846 ; -4.281,84.846 -2.145,84.999 ; -2.145,84.999 cw(c-2.141,84.949) -2.142,84.999 -2.142,84.999 ; -2.145,84.999 cw(c-2.141,84.949) -2.142,84.999 ; -2.142,84.999 -0.002,85.05 ; -0.002,85.05 cw(c0,85) 0.001,85.05 0.002,85.05 ; -0.001,85.05 cw(c0,85) 0.002,85.05 ; -0.002,85.05 -0.001,85.05 ; 0.002,85.05 2.142,84.999 ; 2.142,84.999 cw(c2.141,84.949) 2.145,84.999 ; 2.142,84.999 cw(c2.141,84.949) 2.145,84.999 ; 2.142,84.999 2.142,84.999 ; 2.145,84.999 4.281,84.846 ; 4.281,84.846 cw(c4.278,84.796) 4.283,84.846 ; 4.281,84.846 cw(c4.278,84.796) 4.283,84.846 ; 4.283,84.846 6.41,84.592 ; 6.41,84.592 cw(c6.404,84.542) 6.412,84.591 ; 6.41,84.592 cw(c6.404,84.542) 6.413,84.591 ; 6.412,84.591 6.413,84.591 ; 6.413,84.591 8.524,84.236 ; 8.524,84.236 cw(c8.516,84.187) 8.527,84.236 ; 8.524,84.236 8.525,84.236 cw(c8.516,84.187) 8.527,84.236 ; 8.527,84.236 cw(c8.516,84.187) 8.527,84.236 ; 8.527,84.236 8.527,84.236 ; 8.527,84.236 8.527,84.236 ; 8.527,84.236 10.62,83.78 ; 10.62,83.78 cw(c10.609,83.732) 10.622,83.78 ; 10.62,83.78 ccw(c10.609,83.732) 10.62,83.78 ; 10.62,83.78 cw(c10.609,83.732) 10.622,83.78 ; 10.62,83.78 10.62,83.78 ; 10.62,83.78 10.62,83.78 ; 10.622,83.78 ccw(c10.609,83.732) 10.622,83.78 ; 10.622,83.78 10.622,83.78 ; 10.622,83.78 10.622,83.78 ; 10.622,83.78 12.691,83.226 ; 12.691,83.225 cw(c12.678,83.177) 12.693,83.225 ; 12.691,83.225 ccw(c12.678,83.177) 12.691,83.226 ; 12.691,83.226 cw(c12.678,83.177) 12.693,83.225 ; 12.691,83.226 12.691,83.226 ; 12.691,83.226 12.691,83.225 ; 12.693,83.225 14.733,82.573 ; 14.733,82.573 cw(c14.718,82.525) 14.736,82.572 ; 14.733,82.573 cw(c14.718,82.525) 14.735,82.572 ; 14.736,82.572 ccw(c14.718,82.525) 14.735,82.572 ; 14.735,82.572 14.736,82.572 ; 14.736,82.572 14.736,82.572 ; 14.736,82.572 16.742,81.823 ; 16.742,81.823 cw(c16.725,81.777) 16.744,81.823 ; 16.742,81.823 ccw(c16.725,81.777) 16.742,81.823 ; 16.742,81.823 cw(c16.725,81.777) 16.744,81.823 ; 16.742,81.823 16.742,81.823 ; 16.742,81.823 16.742,81.823 ; 16.744,81.823 18.713,80.979 ; 18.713,80.979 cw(c18.694,80.933) 18.716,80.978 ; 18.713,80.979 cw(c18.694,80.933) 18.715,80.979 ; 18.716,80.978 ccw(c18.694,80.933) 18.715,80.979 ; 18.715,80.979 18.716,80.978 ; 18.716,80.978 18.716,80.978 ; 18.716,80.978 20.642,80.043 ; 20.642,80.042 cw(c20.62,79.998) 20.644,80.042 ; 20.642,80.042 ccw(c20.62,79.998) 20.642,80.043 ; 20.642,80.042 20.642,80.043 ; 20.642,80.043 cw(c20.62,79.998) 20.644,80.042 ; 20.642,80.043 20.642,80.043 ; 20.644,80.042 22.524,79.015 ; 22.524,79.015 cw(c22.5,78.971) 22.526,79.014 ; 22.524,79.015 cw(c22.5,78.971) 22.526,79.014 ; 22.526,79.014 24.355,77.899 ; 24.355,77.899 cw(c24.329,77.856) 24.357,77.898 ; 24.355,77.899 cw(c24.329,77.856) 24.357,77.898 ; 24.357,77.898 24.357,77.898 ; 24.357,77.898 26.13,76.698 ; 26.13,76.698 cw(c26.103,76.656) 26.133,76.696 ; 26.13,76.698 26.131,76.697 cw(c26.103,76.656) 26.133,76.696 ; 26.133,76.696 27.847,75.412 ; 27.847,75.412 cw(c27.817,75.372) 27.849,75.411 ; 27.847,75.412 cw(c27.817,75.372) 27.849,75.411 ; 27.849,75.411 29.501,74.047 ; 29.501,74.047 cw(c29.469,74.009) 29.502,74.046 ; 29.501,74.047 cw(c29.469,74.009) 29.502,74.046 ; 29.502,74.046 cw(c29.469,74.009) 29.503,74.046 ; 29.502,74.046 29.502,74.046 ; 29.503,74.046 29.502,74.046 ; 29.503,74.046 31.087,72.605 ; 31.087,72.605 cw(c31.054,72.568) 31.087,72.605 ; 31.087,72.605 31.087,72.605 ; 31.087,72.605 cw(c31.054,72.568) 31.089,72.603 ; 31.087,72.605 cw(c31.054,72.568) 31.089,72.603 ; 31.087,72.605 31.087,72.605 ; 31.089,72.603 32.603,71.089 ; 31.5,-0.05 ccw(c31.5,0) 31.55,0 ; 31.5,-0.05 ccw(c31.5,0) 31.55,0 ; 32.603,71.089 cw(c32.568,71.054) 32.605,71.087 ; 32.603,71.089 cw(c32.568,71.054) 32.605,71.087 ; 32.605,71.087 ccw(c32.568,71.054) 32.605,71.087 ; 32.605,71.087 34.046,69.503 ; 32.605,71.087 32.605,71.087 ; 32.605,71.087 32.605,71.087 ; 34.046,69.502 cw(c34.009,69.469) 34.047,69.501 ; 34.046,69.502 ccw(c34.009,69.469) 34.046,69.503 ; 34.046,69.502 cw(c34.009,69.469) 34.047,69.501 ; 34.046,69.502 34.046,69.502 ; 34.046,69.503 34.046,69.502 ; 34.047,69.501 35.411,67.849 ; 35.411,67.849 cw(c35.372,67.817) 35.412,67.847 ; 35.411,67.849 cw(c35.372,67.817) 35.412,67.847 ; 35.412,67.847 36.696,66.133 ; 36.696,66.133 cw(c36.656,66.103) 36.697,66.131 ; 36.696,66.133 cw(c36.656,66.103) 36.698,66.13 ; 36.698,66.13 37.898,64.357 ; 36.697,66.131 36.698,66.13 ; 37.898,64.357 cw(c37.856,64.329) 37.899,64.355 ; 37.898,64.357 cw(c37.856,64.329) 37.899,64.355 ; 37.898,64.357 37.898,64.357 ; 37.899,64.355 39.014,62.526 ; 39.014,62.526 cw(c38.971,62.5) 39.015,62.524 ; 39.014,62.526 cw(c38.971,62.5) 39.015,62.524 ; 39.015,62.524 40.041,60.644 ; 40.041,60.644 cw(c39.998,60.62) 40.043,60.642 ; 40.041,60.644 cw(c39.998,60.62) 40.042,60.642 ; 40.043,60.642 ccw(c39.998,60.62) 40.042,60.642 ; 40.043,60.642 40.978,58.716 ; 40.043,60.642 40.043,60.642 ; 40.043,60.642 40.042,60.642 ; 40.979,58.715 cw(c40.933,58.694) 40.979,58.713 ; 40.979,58.715 ccw(c40.933,58.694) 40.978,58.716 ; 40.979,58.715 40.978,58.716 ; 40.978,58.716 cw(c40.933,58.694) 40.979,58.713 ; 40.978,58.716 40.978,58.716 ; 40.979,58.713 41.823,56.745 ; 41.823,56.742 ccw(c41.777,56.725) 41.823,56.745 ; 41.823,56.742 ccw(c41.777,56.725) 41.823,56.742 ; 41.823,56.742 ccw(c41.777,56.725) 41.823,56.745 ; 41.823,56.742 42.572,54.736 ; 41.823,56.742 41.823,56.742 ; 41.823,56.742 41.823,56.742 ; 42.573,54.733 ccw(c42.525,54.718) 42.572,54.735 ; 42.573,54.733 ccw(c42.525,54.718) 42.572,54.736 ; 42.573,54.733 43.225,52.693 ; 42.572,54.735 ccw(c42.525,54.718) 42.572,54.736 ; 42.572,54.736 42.572,54.735 ; 42.572,54.736 42.572,54.736 ; 43.226,52.691 ccw(c43.177,52.678) 43.225,52.693 ; 43.226,52.691 ccw(c43.177,52.678) 43.225,52.691 ; 43.225,52.691 ccw(c43.177,52.678) 43.225,52.693 ; 43.226,52.691 43.226,52.691 ; 43.225,52.691 43.226,52.691

## Silkscreen, mask and mechanical layers (free items; w line width, h text height)
Mechanical 1:
  drawing of 317 lines, arcs and shapes, not listed